# Altium PCB Projet_PCB.PcbDoc
Units mil, origin at the board's own origin, x right, y up, seen from the top; angles counter-clockwise.
Board outline 4780 x 3335 mil, 2 copper layers (Top Layer, Bottom Layer); 41 components, 25 nets, 320 pads, 22 vias.
Unrouted connection lines stored in the file: 20.
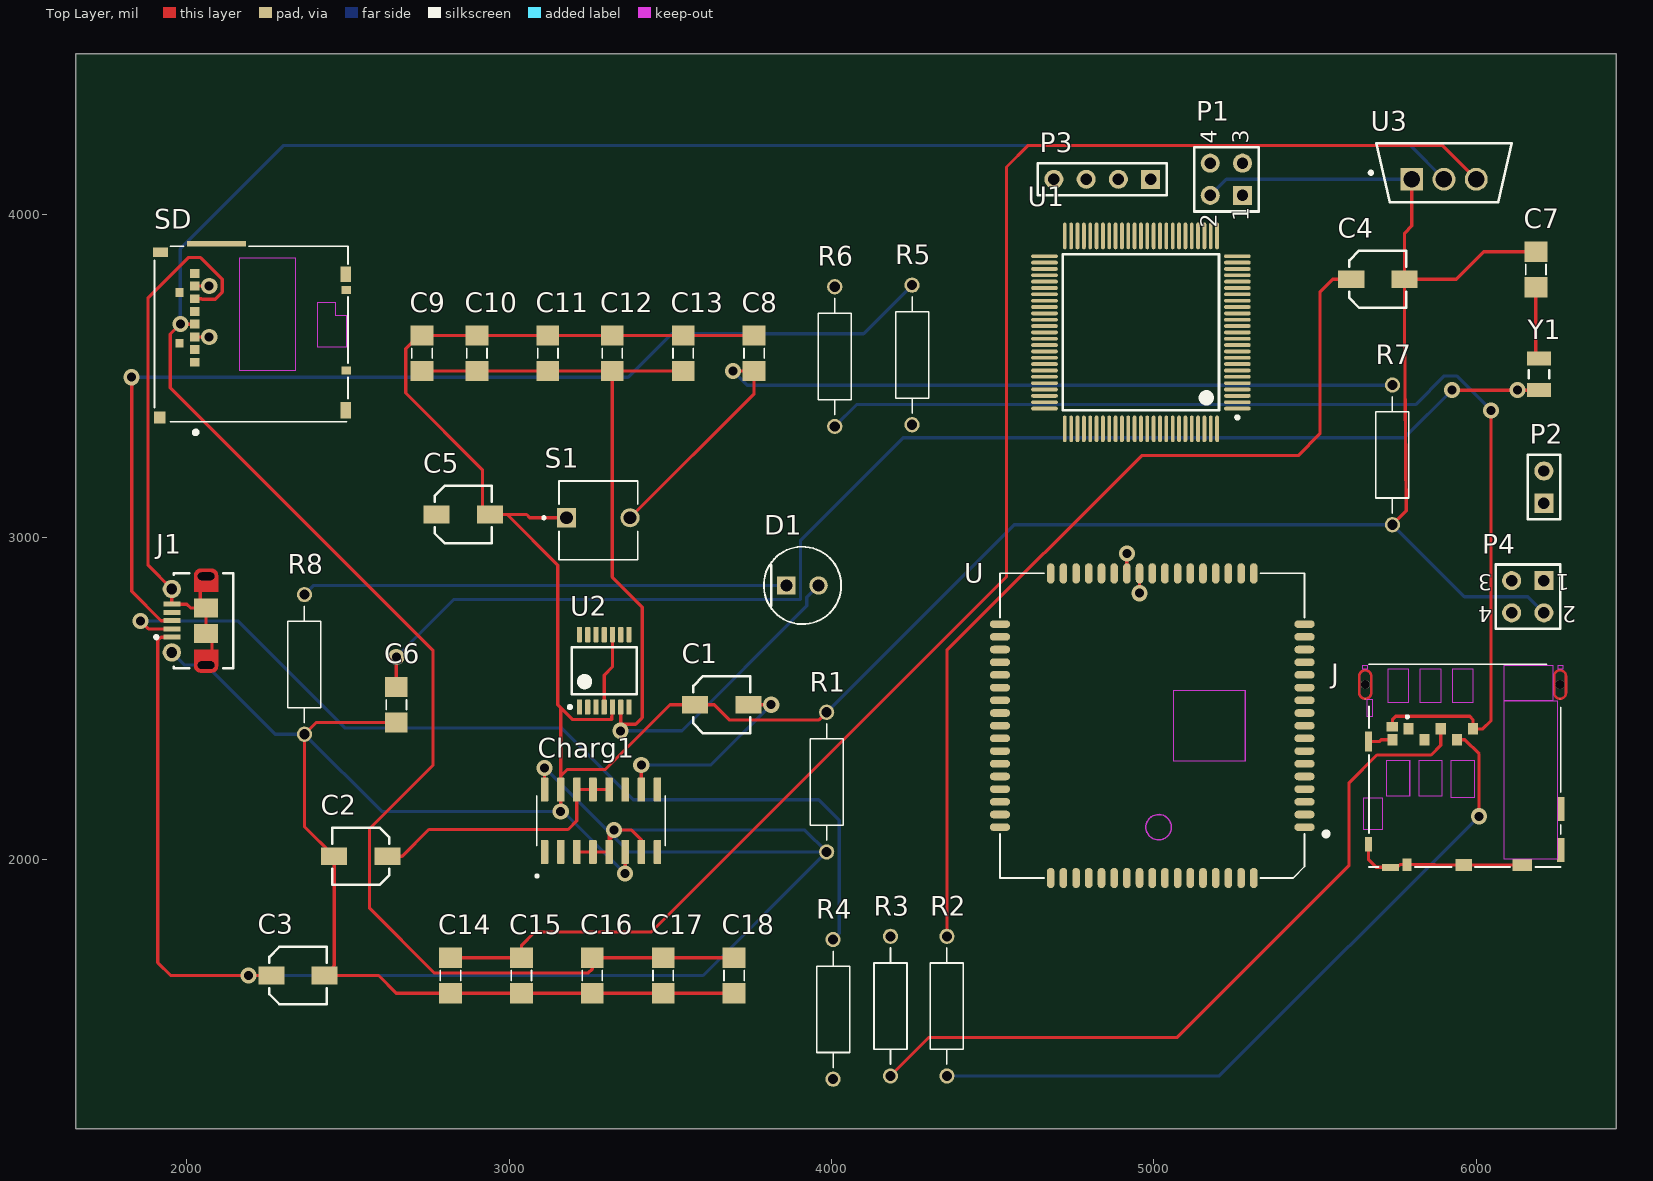
[diagram p0: Top Layer view]
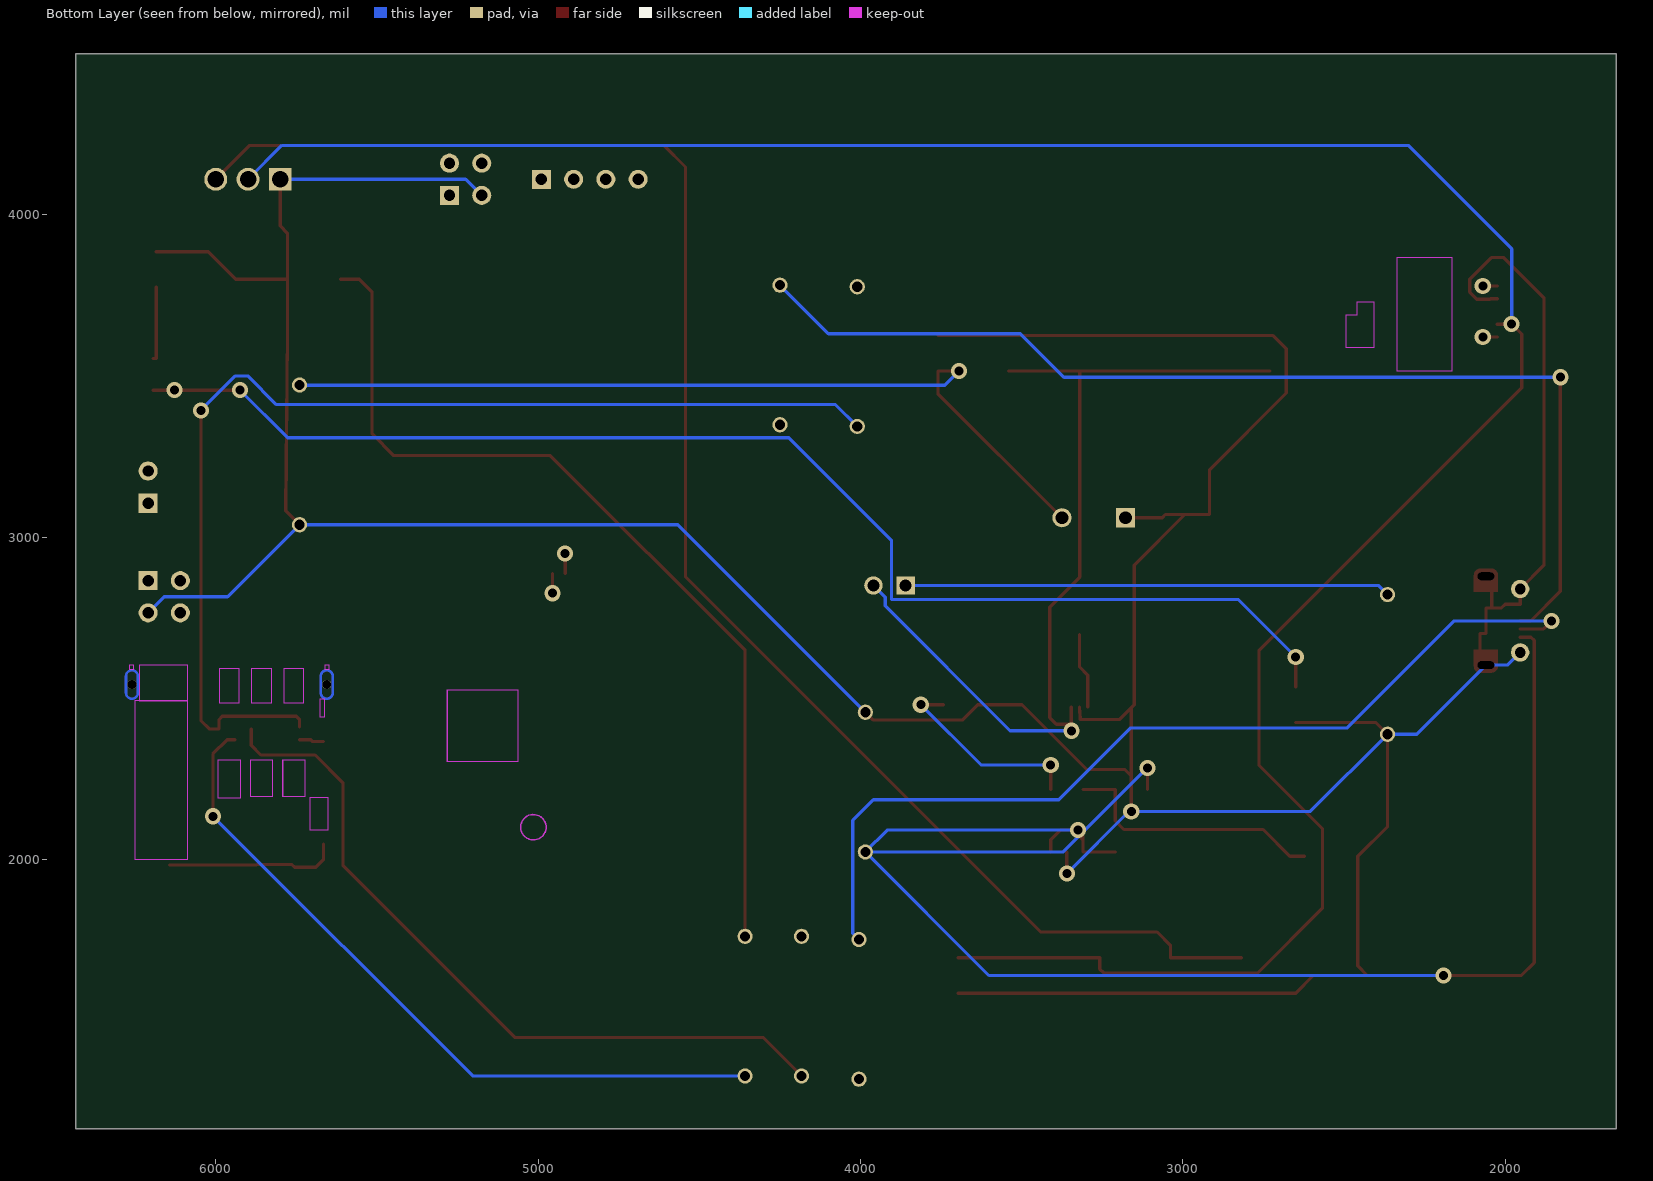
[diagram p1: Bottom Layer view, seen from below]
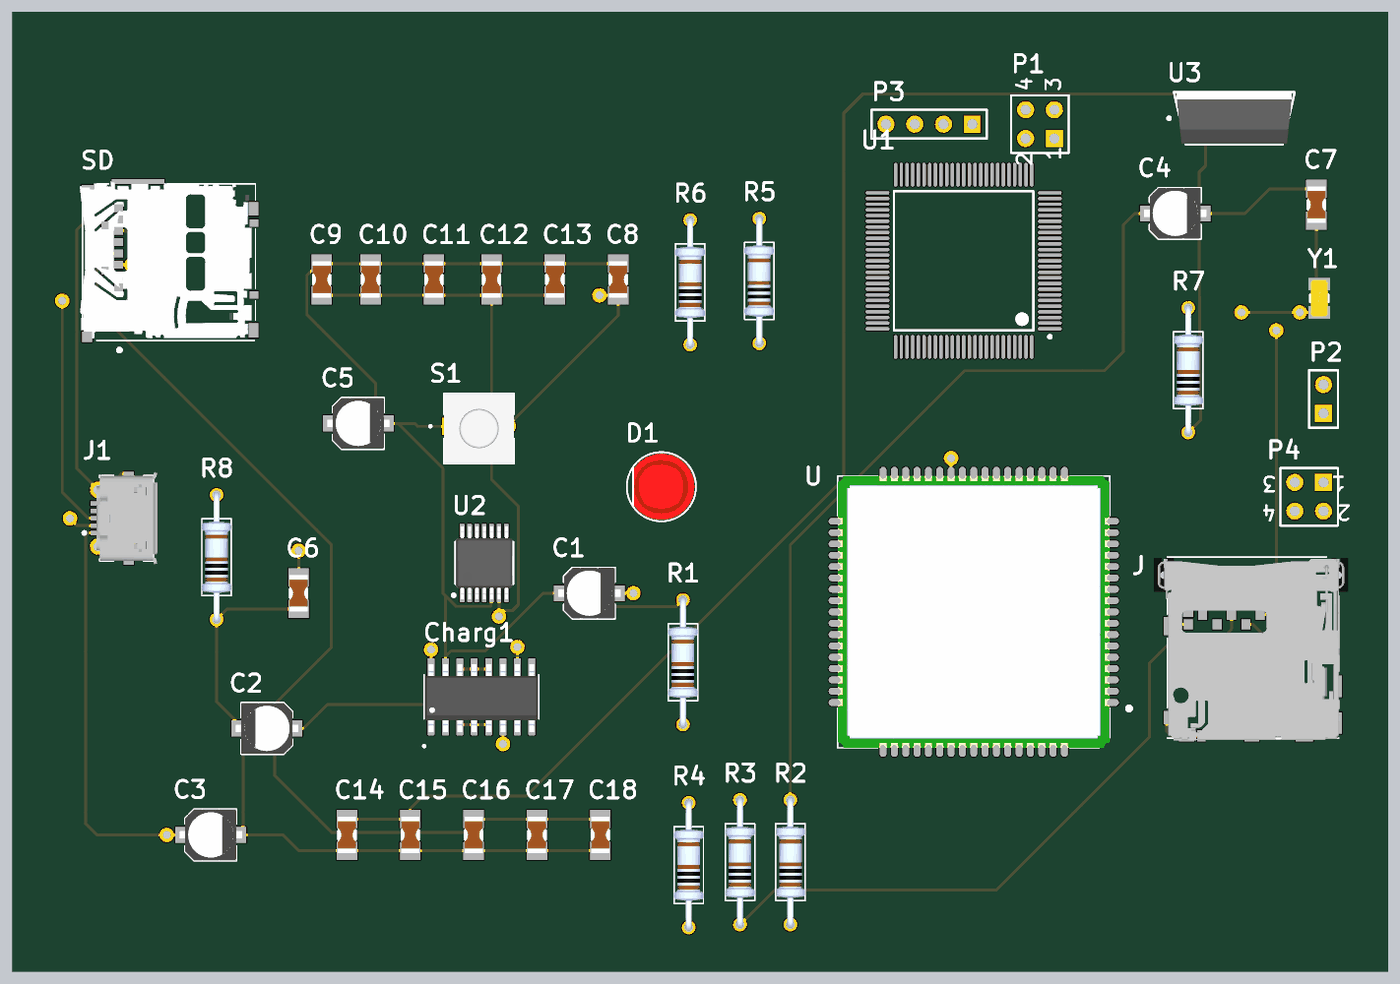
[diagram p2: 3D render of the assembled board from above, using the file's embedded part models]

## Layer stack, top to bottom
Top Solder: solder mask 0.4, Solder Resist, Dk 3.5
Top Layer: signal copper 1.4
Dielectric 1: dielectric 12.6, FR-4, Dk 4.8
Bottom Layer: signal copper 1.4
Bottom Solder: solder mask 0.4, Solder Resist, Dk 3.5

## Board outline
1655,1165 6435,1165 6435,4500 1655,4500

## Design rules (kind name [scope] priority, off if disabled: settings)
Clearance [All] p1: gap=10 ignorepadtopadclearanceinfootprint=FALSE except(0: Arc-Hole Track-Hole SMDPad-Hole THPad-Hole Via-Hole Fill-Hole Poly-Hole Region-Hole Text-Hole)
PolygonConnect [All] p1: connectstyle=Relief reliefconductorwidth=10 reliefentries=4 polygonreliefangle="90 Angle" airgapwidth=10
RoutingVias [All] p1: holewidth=28 width=50 viastyle="Through Hole" minholewidth=28 minwidth=50 maxholewidth=28 maxwidth=50
SolderMaskExpansion [All] p1: expansion=4 istentingtop=FALSE
Width [All] p1: maxlimit=10 minlimit=10 preferedwidth=10
30 further rules are at their usual default settings.

## Components (designator, comment, footprint, x,y, rotation, side; value= is the part's Value field where it differs from the comment)
C1 "EEE-1CA100SR" Capacitor 3660,2480 r0 top
C2 "EEE-1CA100SR" Capacitor 2540,2010 r180 top
C3 "EEE-1CA100SR" Capacitor 2345,1640 r0 top
C4 "EEE-1CA100SR" Capacitor 5695,3800 r0 top
C5 "EEE-1CA100SR" Capacitor 2857.68,3070 r0 top
C6 "capacitorrect" CAPCRect 2650,2480 r270 top
C7 "capacitorrect" CAPCRect 6185,3830.12 r90 top
C8 "capacitorrect" CAPCRect 3760,3570.12 r90 top
C9 "capacitorrect" CAPCRect 2730,3570.12 r90 top
C10 "capacitorrect" CAPCRect 2900,3570.12 r90 top
C11 "capacitorrect" CAPCRect 3120,3570.12 r90 top
C12 "capacitorrect" CAPCRect 3320,3570.12 r90 top
C13 "capacitorrect" CAPCRect 3540,3570.12 r90 top
C14 "capacitorrect" CAPCRect 2817.95,1640 r90 top
C15 "capacitorrect" CAPCRect 3037.95,1640 r90 top
C16 "capacitorrect" CAPCRect 3257.95,1640 r90 top
C17 "capacitorrect" CAPCRect 3477.95,1640 r90 top
C18 "capacitorrect" CAPCRect 3697.95,1640 r90 top
Charg1 "chargeur li" chargeurli 3285,2120 r90 top
D1 "HLMP-4700" Led 3910,2850 r0 top
J "Simcard" Simconnector 5865,2353.82 r180 top
J1 "105017-0001" USB-MICRO-B_V 2006.85,2740.63 r90 top
P1 "Header 2X2" HDR2X2 5275,4060 r90 top
P2 "Header 2" HDR1X2 6210,3105 r90 top
P3 "Header 4" HDR1X4 4990,4110 r180 top
P4 "Header 2X2" HDR2X2 6210,2865 r180 top
R1 "RESISTORTH" RESTH 3985,2240 r90 top
R2 "RESISTORTH" RESTH 4357.95,1545 r90 top
R3 "RESISTORTH" RESTH 4182.95,1545 r90 top
R4 "RESISTORTH" RESTH 4005,1535 r90 top
R5 "RESISTORTH" RESTH 4250,3565 r90 top
R6 "RESISTORTH" RESTH 4010,3560 r90 top
R7 "RESISTORTH" RESTH 5740,3255 r90 top
R8 "RESISTORTH" RESTH 2365,2605 r90 top
S1 "switcher" switcher 3276.57,3060 r0 top
SD "SDcard" SD 2200,3630 r270 top
U "SIM900" sim900 4995,2415 r180 top
U1 "STM32F407VGT6J" Stm32 4960,3635 r180 top
U2 "TPA6138A2PWR" audio 3295,2585 r90 top
U3 "LM317KCT" LM317 5900,4130.37 r90 top
Y1 "ABS07-166-32.768KHZ-T" XTAL 6195,3505 r270 top

## Footprints (in the part's own frame and the unit in brackets; to place one, negate y for a bottom-side part, rotate by r counter-clockwise, add the part's x,y. Pads: shape width x height; smd on the part's side, far side on the other; paste and mask are expansions set on the pad)
audio [mm] "SOP, 14-Leads, Body 5.1x4.5mm, Pitch 0.65mm, IPC High Density"
  rrect25% 1.2x0.4 smd: 1(-2.85,1.95) 2(-2.85,1.3) 3(-2.85,0.65) 4(-2.85,0) 5(-2.85,-0.65) 6(-2.85,-1.3) 7(-2.85,-1.95) 8(2.85,-1.95) 9(2.85,-1.3) 10(2.85,-0.65) 11(2.85,0) 12(2.85,0.65) 13(2.85,1.3) 14(2.85,1.95)
  silkscreen extent -2.97,-2.55 1.85,2.82, body extent -3.21,-2.5 3.21,2.5, height 1
Capacitor [mm] "Aluminum Electrolytic Capacitor, 2-Leads, Body 4.5x4.5mm, IPC High Density"
  rect 2.05x1.4 smd: 1(-2.1,0) 2(2.1,0)
  silkscreen extent -2.25,-2.25 2.25,2.25, body extent -2.75,-2.25 2.75,2.25, height 5.5
CAPCRect [mm]
  rect 1.6x1.8 smd: 1(-1.4,0) 2(1.4,0)
  silkscreen extent -0.4,-0.8 0.4,0.8, body extent -1.6,-0.8 1.6,0.8, height 1.5
chargeurli [mm]
  rrect25% 1.9x0.6 smd: 1(-2.455,4.445) 2(-2.455,3.175) 3(-2.455,1.905) 4(-2.455,0.635) 5(-2.455,-0.635) 6(-2.455,-1.905) 7(-2.455,-3.175) 8(-2.455,-4.445) 9(2.455,-4.445) 10(2.455,-3.175) 11(2.455,-1.905) 12(2.455,-0.635) 13(2.455,0.635) 14(2.455,1.905) 15(2.455,3.175) 16(2.455,4.445)
  silkscreen extent -4.45,-5.07 1.95,5.14, body extent -3.13,-4.95 2.87,4.95, height 1.75
HDR1X2 [mm] "Connector; Header; 2 Position"
  rect 1.5x1.5 hole 0.9: 1(0,0)
  round 1.5 hole 0.9: 2(2.54,0)
  silkscreen extent -1.27,-1.27 3.81,1.27
HDR1X4 [mm] "Connector; Header; 4 Position"
  rect 1.5x1.5 hole 0.9: 1(0,0)
  round 1.5 hole 0.9: 2(2.54,0) 3(5.08,0) 4(7.62,0)
  silkscreen extent -1.27,-1.27 8.89,1.27
HDR2X2 [mm] "Connector; Header; 2x2 Position"
  rect 1.5x1.5 hole 0.9: 1(0,0)
  round 1.5 hole 0.9: 2(0,2.54) 3(2.54,0) 4(2.54,2.54)
  silkscreen extent -1.27,-1.27 3.81,3.81
Led [mm]
  rect 1.45x1.45 hole 0.95 paste-1000 mask+0: 1(-1.27,0)
  round 1.45 hole 0.95 paste-1000 mask+0: 2(1.27,0)
  silkscreen extent -3.05,-3.05 3.05,3.05, body extent -3.15,-3.15 3.15,3.15, height 0.25
LM317 [mm]
  rect 1.8x1.8 hole 1.3 paste-1000 mask+0: 1(-0.517,2.54)
  round 1.8 hole 1.3 paste-1000 mask+0: 2(-0.517,0) 3(-0.517,-2.54)
  silkscreen extent -2.33,-5.34 2.33,5.88, body extent -2.42,-5.44 2.42,5.44, height 0.25
RESTH [mm]
  round 1.2 hole 0.8: 1(-5.5,0) 2(5.5,0)
  silkscreen extent -4.58,-1.3 4.58,1.3, body extent -5.77,-1.3 5.77,1.3, height 2.6
SD [mm]
  rect 0.7x0.75 smd: 1(2.225,-4.45) 2(1.225,-4.45) 3(0.225,-4.45) 4(-0.775,-4.45) 5(-1.775,-4.45) 6(-2.775,-4.45) 7(-3.775,-4.45) 8(-4.775,-4.45)
  rect 0.7x0.65 smd: 9(0.725,-5.65) 10(-3.275,-5.65)
  rect 0.65x0.75 smd: 11(2.875,7.5) 12(-3.475,7.5)
  rect 0.745x1.15 smd: SH1(-6.46,-7.15)
  rect 0.95x0.9 smd: SH2(6.575,-7.225)
  rect 0.42x4.63 smd: SH3(-7.123,-2.74)
  rect 1.2x0.85 smd: SH4(-4.713,7.45)
  rect 1.3x0.85 smd: SH5(6.012,7.45)
  Keep-Out Layer region: 1.038,5.225 -2.512,5.225 -2.512,6.625 -1.468,6.625 -1.468,7.475 1.038,7.475
  Keep-Out Layer region: 2.887,-0.925 -6.013,-0.925 -6.013,3.475 2.887,3.475
  silkscreen extent -6.91,-7.62 7.9,7.62, body extent -7.21,-7.86 6.79,7.41
sim900 [mm]
  oval 1.6x0.6 smd: 1(-12,8) 2(-12,7) 3(-12,6) 4(-12,5) 5(-12,4) 6(-12,3) 7(-12,2) 8(-12,1) 9(-12,0) 10(-12,-1) 11(-12,-2) 12(-12,-3) 13(-12,-4) 14(-12,-5) 15(-12,-6) 16(-12,-7) 17(-12,-8) 35(12,-8) 36(12,-7) 37(12,-6) 38(12,-5) 39(12,-4) 40(12,-3) 41(12,-2) 42(12,-1) 43(12,0) 44(12,1) 45(12,2) 46(12,3) 47(12,4) 48(12,5) 49(12,6) 50(12,7) 51(12,8)
  oval 0.6x1.6 smd: 18(-8,-12) 19(-7,-12) 20(-6,-12) 21(-5,-12) 22(-4,-12) 23(-3,-12) 24(-2,-12) 25(-1,-12) 26(0,-12) 27(1,-12) 28(2,-12) 29(3,-12) 30(4,-12) 31(5,-12) 32(6,-12) 33(7,-12) 34(8,-12) 52(8,12) 53(7,12) 54(6,12) 55(5,12) 56(4,12) 57(3,12) 58(2,12) 59(1,12) 60(0,12) 61(-1,12) 62(-2,12) 63(-3,12) 64(-4,12) 65(-5,12) 66(-6,12) 67(-7,12) 68(-8,12)
  Keep-Out Layer circle w0.127: c-0.5,8 r1
  Keep-Out Layer circle w0.127: c-0.5,8 r1
  Keep-Out Layer circle w0.127: c-0.5,8 r1
  Keep-Out Layer region: -1.7,-2.804 -7.31,-2.804 -7.31,2.8 -1.7,2.8
  Keep-Out Layer region: -1.7,-2.803 -7.308,-2.803 -7.308,2.8 -1.7,2.8
  silkscreen extent -13.75,-12 12,12, body extent -12,-12 12,12, height 2.8
Simconnector [mm]
  rect 0.8x0.9 smd: C1(1.905,-1.3) C2(-0.635,-1.3) C3(-3.175,-1.3) C5(3.175,-0.45) C6(0.635,-0.45) C7(-1.905,-0.45)
  rect 0.1x0.1 smd paste-1 mask+0: C8(5.315,-3.657) C17(-10.035,-3.657)
  rect 0.54x1.6 smd: C9(5.065,-0.3)
  rect 0.54x1.17 smd: C10(5.065,7.785)
  rect 1.33x0.55 smd: C11(3.33,9.605)
  rect 0.7x0.98 smd: C12(2.015,9.39)
  rect 1.3x0.91 smd: C13(-2.435,9.425)
  rect 1.53x0.91 smd: C14(-7.07,9.425)
  rect 0.6x1.9 smd: C15(-10.085,8.25)
  rect 0.5x1.9 smd: C16(-10.135,5.02)
  rect 0.9x0.75 smd: SW(3.175,-1.475)
  round 0.7 hole 0.7 unplated: ""(-10.035,-4.8) ""(5.315,-4.8)
  Top Layer region: 124 vertices and 1 holes, not listed, extent -10.585,-6 -9.485,-3.6
  Top Layer region: 126 vertices and 1 holes, not listed, extent 4.765,-6 5.865,-3.6
  Bottom Layer region: 124 vertices and 1 holes, not listed, extent -10.585,-6 -9.485,-3.6
  Bottom Layer region: 126 vertices and 1 holes, not listed, extent 4.765,-6 5.865,-3.6
  Keep-Out Layer region: -5.624,-3.502 -9.806,-3.502 -9.806,8.97 -5.624,8.97
  Keep-Out Layer region: -5.624,-6.326 -9.458,-6.326 -9.458,-3.5 -5.624,-3.5
  Keep-Out Layer region: -1.565,-6.021 -3.155,-6.021 -3.155,-3.35 -1.565,-3.35
  Keep-Out Layer region: 0.975,-6.024 -0.615,-6.024 -0.615,-3.35 0.975,-3.35
  Keep-Out Layer region: 3.515,-6.031 1.928,-6.031 1.928,-3.35 3.515,-3.35
  Keep-Out Layer region: 5.515,-6.332 5.175,-6.332 5.175,-6.02 5.515,-6.02
  Keep-Out Layer region: 5.165,-3.65 4.765,-3.65 4.765,-2.25 5.165,-2.25
  Keep-Out Layer region: -1.465,1.172 -3.261,1.172 -3.261,4.12 -1.465,4.12
  Keep-Out Layer region: 1.075,1.171 -0.716,1.171 -0.716,4 1.075,4
  Keep-Out Layer region: 3.615,1.172 1.828,1.172 1.828,4 3.615,4
  Keep-Out Layer region: 5.42,4.127 3.977,4.127 3.977,6.63 5.42,6.63
  Keep-Out Layer region: -9.9,-6.323 -10.24,-6.323 -10.24,-6.02 -9.9,-6.02
  Keep-Out Layer region: -5.624,-3.505 -9.815,-3.505 -9.815,8.97 -5.624,8.97
  Keep-Out Layer region: -5.624,-6.322 -9.452,-6.322 -9.452,-3.5 -5.624,-3.5
  Keep-Out Layer region: -1.565,-6.027 -3.159,-6.027 -3.159,-3.35 -1.565,-3.35
  Keep-Out Layer region: 0.975,-6.023 -0.615,-6.023 -0.615,-3.35 0.975,-3.35
  Keep-Out Layer region: 3.515,-6.021 1.925,-6.021 1.925,-3.35 3.515,-3.35
  Keep-Out Layer region: 5.515,-6.326 5.17,-6.326 5.17,-6.02 5.515,-6.02
  Keep-Out Layer region: 5.165,-3.653 4.768,-3.653 4.768,-2.25 5.165,-2.25
  Keep-Out Layer region: -1.465,1.172 -3.261,1.172 -3.261,4.12 -1.465,4.12
  Keep-Out Layer region: 1.075,1.171 -0.716,1.171 -0.716,4 1.075,4
  Keep-Out Layer region: 3.615,1.171 1.826,1.171 1.826,4 3.615,4
  Keep-Out Layer region: 5.42,4.123 3.973,4.123 3.973,6.63 5.42,6.63
  Keep-Out Layer region: -9.9,-6.332 -10.255,-6.332 -10.255,-6.02 -9.9,-6.02
  Keep-Out Layer region: -5.624,-3.506 -9.818,-3.506 -9.818,8.97 -5.624,8.97
  Keep-Out Layer region: -5.624,-6.322 -9.454,-6.322 -9.454,-3.5 -5.624,-3.5
  Keep-Out Layer region: -1.565,-6.024 -3.157,-6.024 -3.157,-3.35 -1.565,-3.35
  Keep-Out Layer region: 0.975,-6.03 -0.616,-6.03 -0.616,-3.35 0.975,-3.35
  Keep-Out Layer region: 3.515,-6.028 1.927,-6.028 1.927,-3.35 3.515,-3.35
  Keep-Out Layer region: 5.515,-6.332 5.175,-6.332 5.175,-6.02 5.515,-6.02
  Keep-Out Layer region: 5.165,-3.653 4.769,-3.653 4.769,-2.25 5.165,-2.25
  Keep-Out Layer region: -1.465,1.172 -3.261,1.172 -3.261,4.12 -1.465,4.12
  Keep-Out Layer region: 1.075,1.171 -0.715,1.171 -0.715,4 1.075,4
  Keep-Out Layer region: 3.615,1.17 1.825,1.17 1.825,4 3.615,4
  Keep-Out Layer region: 5.42,4.121 3.971,4.121 3.971,6.63 5.42,6.63
  Keep-Out Layer region: -9.9,-6.332 -10.255,-6.332 -10.255,-6.02 -9.9,-6.02
  silkscreen extent -10.09,-6.4 5.01,9.58, body extent -10.16,-6.22 5.33,9.78, height 0.65
Stm32 [mm] "Thin QFP, 100-Leads, Body 14x14mm, Pitch 0.5mm, IPC Low Density"
  oval 2.1x0.3 smd: 1(-7.6,6) 2(-7.6,5.5) 3(-7.6,5) 4(-7.6,4.5) 5(-7.6,4) 6(-7.6,3.5) 7(-7.6,3) 8(-7.6,2.5) 9(-7.6,2) 10(-7.6,1.5) 11(-7.6,1) 12(-7.6,0.5) 13(-7.6,0) 14(-7.6,-0.5) 15(-7.6,-1) 16(-7.6,-1.5) 17(-7.6,-2) 18(-7.6,-2.5) 19(-7.6,-3) 20(-7.6,-3.5) 21(-7.6,-4) 22(-7.6,-4.5) 23(-7.6,-5) 24(-7.6,-5.5) 25(-7.6,-6) 51(7.6,-6) 52(7.6,-5.5) 53(7.6,-5) 54(7.6,-4.5) 55(7.6,-4) 56(7.6,-3.5) 57(7.6,-3) 58(7.6,-2.5) 59(7.6,-2) 60(7.6,-1.5) 61(7.6,-1) 62(7.6,-0.5) 63(7.6,0) 64(7.6,0.5) 65(7.6,1) 66(7.6,1.5) 67(7.6,2) 68(7.6,2.5) 69(7.6,3) 70(7.6,3.5) 71(7.6,4) 72(7.6,4.5) 73(7.6,5) 74(7.6,5.5) 75(7.6,6)
  oval 0.3x2.1 smd: 26(-6,-7.6) 27(-5.5,-7.6) 28(-5,-7.6) 29(-4.5,-7.6) 30(-4,-7.6) 31(-3.5,-7.6) 32(-3,-7.6) 33(-2.5,-7.6) 34(-2,-7.6) 35(-1.5,-7.6) 36(-1,-7.6) 37(-0.5,-7.6) 38(0,-7.6) 39(0.5,-7.6) 40(1,-7.6) 41(1.5,-7.6) 42(2,-7.6) 43(2.5,-7.6) 44(3,-7.6) 45(3.5,-7.6) 46(4,-7.6) 47(4.5,-7.6) 48(5,-7.6) 49(5.5,-7.6) 50(6,-7.6) 76(6,7.6) 77(5.5,7.6) 78(5,7.6) 79(4.5,7.6) 80(4,7.6) 81(3.5,7.6) 82(3,7.6) 83(2.5,7.6) 84(2,7.6) 85(1.5,7.6) 86(1,7.6) 87(0.5,7.6) 88(0,7.6) 89(-0.5,7.6) 90(-1,7.6) 91(-1.5,7.6) 92(-2,7.6) 93(-2.5,7.6) 94(-3,7.6) 95(-3.5,7.6) 96(-4,7.6) 97(-4.5,7.6) 98(-5,7.6) 99(-5.5,7.6) 100(-6,7.6)
  silkscreen extent -7.73,-6.15 6.15,6.82, body extent -7,-7 7,7, height 1.6
switcher [mm]
  rect 1.508x1.508 / inner round 1.508 / far side rect 1.508x1.508 hole 1: 1(-2.5,0)
  round 1.508 hole 1: 2(2.5,0)
  silkscreen extent -4.39,-3.3 3.1,2.9, body extent -3.1,-3.3 3.1,2.9, height 4.3
USB-MICRO-B_V [mm] "USB, MICRO B, Body 7.491x4.695 mm, Pitch 0.65 mm"
  rect 0.4x1.35 smd: 1(-1.3,1.35) 2(-0.65,1.35) 3(0,1.35) 4(0.65,1.35) 5(1.3,1.35)
  round 1.45 hole 0.85: 6(-2.5,1.35) 7(2.5,1.35)
  rrect50% 0x0 hole 0.6 slot 1.3 at 90 deg: 8(-3.5,-1.35) 11(3.5,-1.35)
  rect 1.5x1.9 smd: 9(-1,-1.35) 10(1,-1.35)
  Top Layer circle w0.5: c-3.6,-0.9 r0.25
  Top Layer circle w0.5: c3.6,-1.8 r0.25
  Top Layer circle w0.5: c-3.6,-1.8 r0.25
  Top Layer region: -2.3,-2.3 -2.3,-0.4 -3.6,-0.4 -3.6,-2.3
  Top Layer region: 2.3,-0.4 2.3,-2.3 3.6,-2.3 3.6,-0.4
  Top Layer region: 3.6,-0.9 3.6,-1.8 4.1,-1.8 4.1,-0.9
  Top Layer region: -3.6,-1.8 -3.6,-0.9 -4.1,-0.9 -4.1,-1.8
  Top Layer lines w0.5: 3.35,-0.893 ccw(c3.6,-0.9) 3.5,-1.129 ccw(c3.6,-0.9) 3.6,-1.15 ccw(c3.6,-0.9) 3.35,-0.893
  silkscreen extent -3.75,-3.5 3.75,2.7, body extent -4.1,-3.9 4.1,1.5, height 2.67
XTAL [mm]
  rect 1.1x1.9 smd paste+0 mask+0: 1(-1.25,0) 2(1.25,0)
  silkscreen extent -0.33,-0.8 0.33,0.8, body extent -1.9,-1.05 1.9,1.05, height 0.25

## Part data
C1 C2 C3 C4 C5: library part Capacitor, "Aluminum Electrolytic Capacitor, 10 uF, +/- 20%, -40 to 85 degC, 2-Pin SMD, RoHS, Tape and Reel", AC Ripple Current=28mA, AE Capacitor Case=RadialCan-SMD, Capacitance=10µF, Capacitance Tolerance=±20%, Capacitor Mounting=SMD, Leakage Current=3µA, Life Time @ Temperature=2000hours@85°C, Manufacturer=Panasonic, Operating Life Temperature=85°C, Operating life Time=2000h, Operating Temperature Min=-40°C, Operating Temperature Range=-40°Cto+85°C, Package / Case=B, Package Description="2-Pin Surface Mount Device, Body 4.5 x 4.5 mm", Package Reference=EEE1CA100SR, Power Factor=0.16, Power Factor Frequency=120Hz, Tolerance +=20%, Voltage Rating=16V, Capacitance Tolerance ±=±20%, Capacitor Case Style=RadialCan-SMD, Capacitor Terminals=SMD, Datasheet URL=https://datasheet.ciiva.com/19458/1355487-19458346.pdf, Datasheet Version=04/2005, Diameter=4mm, External Depth=4.3mm, External Length / Height=5.4mm, External Width=4.3mm, Height=5.4mm, Lead Cross-section Width=0.65mm, Lead Length=1.8mm, Lead Spacing=1mm, Lifetime @ Temperature=2000hours@85°C, Manufacturer URL=http://www.panasonic.com/, Mounting Technology=SurfaceMount, No. of Pins=2, Operating Lifetime=2000h, Operating Temperature Max=85°C, Packaging=CutTape, Product Range=PANASONIC-SSeries, Ripple Current AC=28mA, Ripple Current Frequency=120Hz, Ripple Current Temperature=85°C, Series=VS, SVHC=NoSVHC(16-Dec-2013), Tape Width=12mm, Tolerance -=20%, Voltage Rating V DC=16V
C6 C7 C8 C9 C10 C11 C12 C13 C14 C15 C16 C17 C18: "Tantalum Capacitors", Package="1206 AVX", Availability=Unavailable, MF=AVX, MP=TBJA475K020RBLC0024, Price=None, SnapEDA_Link=https://www.snapeda.com/parts/TBJA475K020RBLC0024/AVX/view-part/1734994/?ref=snap
Charg1: Package=None, Availability=Unavailable, MP=MCP73861-I/SL, Price=None
D1: library part led, "LED RED DIFFUSED T-1 3/4 T/H", Colour=Red, Forward Current=2mA, Forward Voltage=1.7V, Manufacturer=Broadcom, Power Dissipation=14mW, Reverse Voltage=5V, Temperature="-40°C to +100°C", Temperature Range High=+100°C, Temperature Range Low=-40°C, Automotive=No, Category=Diode, ComponentLink2Description=Datasheet, ComponentLink2URL=https://docs.broadcom.com/docs/AV02-1557EN, Device Class L1=Optoelectronics, Device Class L2=LEDs, Device Class L3=unset, Digikey Description="LED RED DIFFUSED T-1 3/4 T/H", Lead Free=Yes, Led Orientation=Straight, Luminous Intensity=2.3mcd, Manufacturer Part Number=HLMP-4700, Mouser Description="LED; Red; 2.3mcd; 0.24In.Dia.; T-1-3/4; 500mA; 1.7V; 635nm; 50deg; 5V; 24mW; -55degC;", Octopart=https://octopart.com/hlmp-4700-broadcom-71130526, Package=HLMP-4700, Peak Emmision Wavelength=635nm, RoHS=TRUE, Viewing Angle=50°, Wavelength=626nm
J: "CONNECTOR, SIM SOCKET, 6POS, 2.54MM; Connector Type:SIM Socket; Series:2174803;", Package=None, Voltage_Rating="10 VAC", Availability=Unavailable, Centerline_Pitch="2.54 mm[.1 in]", EU_RoHS_Compliance=Compliant, MF="TE Connectivity", MP=2174803-2, Number_of_Positions=6, Price=None, Product_Type=Connector, SnapEDA_Link=https://www.snapeda.com/parts/2174803-2/TE%20Connectivity%20AMP%20Connectors/view-part/47676/?ref=snap, TE_purchase_URL=https://www.te.com/usa-en/product-2174803-2.html?te_bu=Cor&te_type=disp&te_campaign=seda_glo_cor-seda-global-disp-prtnr-fy19-seda-model-bom-cta_sma-317_1&elqCampaignId=32493
J1: library part USB, "Micro-USB B Receptacle, Right Angle, Bottom Mount, Surface Mount, with Solder Tabs, -30 to 85 degC, 5-Pin USB, RoHS, Tape and Reel", Manufacturer=Molex, Package Description="5-Leads USB, Micro B, Body 7.5 x 5 mm, Pitch 0.65 mm", Package Reference=MICRO-B, Package Version="Rev. F, 12/2012", Standard Package=1, Voltage - Max=30V, 3D Model=105017-0001.stp, Catalog Drawings=1050170001, Category=Connectors,Interconnects, Circuits=5, Connector Type=USB-microB, Datasheet URL=http://www.molex.com/elqNow/elqRedir.htm?ref=http://www.molex.com/webdocs/datasheets/pdf/en-us/1050170001_IO_CONNECTORS.pdf, Datasheet Version=03/2016, Family=USB,DVI,HDMIConnectors, Featured Product=Micro-USBConnectorsUSBConnectors, Features=Shielded,SolderRetention, Gender=Receptacle, Ingress Protection=-, Manufacturer URL=http://www.molex.com/, Mating Products=WM17145-ND-CABLEMICROUSBBTOSTDA1.0MWM17147-ND-CABLEMICROUSBBTOSTDA2.0MWM17146-ND-CABLEMICROUSBBTOSTDA1.5M, Mounting Technology=SurfaceMount, Mounting Type=BoardCutout,SurfaceMount,RightAngle, Number of Contacts=5, Online Catalog=Molex-MicroUSB, Other Names=WM1399DKR, Package URL=http://www.molex.com/pdm_docs/sd/1050170001_sd.pdf, Packaging=Digi-Reel®, PCN Assembly/Origin=ResinSupplier21/Oct/2015, RoHS Information=1050170001CertofCompliance, Series=-, Specifications=-
P1 P4: "Header, 2-Pin, Dual row", LatestRevisionDate=17-Jul-2002, LatestRevisionNote="Re-released for DXP Platform.", Publisher="Altium Limited"
P2: "Header, 2-Pin", LatestRevisionDate=17-Jul-2002, LatestRevisionNote="Re-released for DXP Platform.", Publisher="Altium Limited"
P3: "Header, 4-Pin", LatestRevisionDate=17-Jul-2002, LatestRevisionNote="Re-released for DXP Platform.", Publisher="Altium Limited"
R1 R2 R3 R4 R5 R6 R7 R8: "10.2 kOhms Â±1% 0.25W, 1/4W Through Hole Resistor Axial - Metal Film", Package="Axial Yageo", Availability="In Stock", Check_prices=https://www.snapeda.com/parts/MFR-25FBF52-10K/Yageo/view-part/?ref=eda, MF=Yageo, MP=MFR-25FBF52-10K, Price=None, Purchase-URL=https://pricing.snapeda.com/search/part/MFR-25FBF52-10K/?ref=eda, SnapEDA_Link=https://www.snapeda.com/parts/MFR-25FBF52-10K/Yageo/view-part/?ref=snap
S1: "SWITCH TACTILE SPST-NO 0.05A 12V", Package=None, Availability="In Stock", Check_prices=https://www.snapeda.com/parts/TL59NF160Q/E-Switch/view-part/?ref=eda, MF=E-Switch, MP=TL59NF160Q, Price=None, Purchase-URL=https://pricing.snapeda.com/search/part/TL59NF160Q/?ref=eda, SnapEDA_Link=https://www.snapeda.com/parts/TL59NF160Q/E-Switch/view-part/?ref=snap
SD: "microSD Memory Card Push-push Type SCHA Series", Package=None, Availability=Unavailable, MF=ALPS, MP=SCHA4B0419, Price=None, SnapEDA_Link=https://www.snapeda.com/parts/SCHA4B0419/ALPS/view-part/455281/?ref=snap
U: "LPC11U00 GPRS/GSM For Use With LPC11U37, SIM900, mbed-Enabled Development", Package="DIP-60 Simcom", Availability=Unavailable, MF="Seeed Technology", MP=SIM900, Price=None, SnapEDA_Link=https://www.snapeda.com/parts/SIM900/Seeed%20Technology%20Co.%2C%20Ltd/view-part/105877/?ref=snap
U1: library part Stm, "ARM Cortex-M4 32-bit MCU+FPU, 210 DMIPS, 1024 kB Flash, 192 kB Internal RAM, 82 I/Os, 100-pin LQFP, -40 to 85 degC, Tray", I/Os (High Current)=82, Manufacturer=STMicroelectronics, Operating Frequency(F) (Processor speed) (MHz)=168, Supply Voltage(Vcc) max (V)=3.6, Supply Voltage(Vcc) min (V)=1.8, ComponentLink1Description="Manufacturer URL", ComponentLink1URL=http://www.st.com/web/en/home.html, ComponentLink2Description=Datasheet, ComponentLink2URL=http://www.st.com/st-web-ui/static/active/en/resource/technical/document/datasheet/DM00037051.pdf, ComponentLink3Description="Package Specification", ComponentLink3URL=http://www.st.com/st-web-ui/static/active/en/resource/technical/document/data_brief/DM00071938.pdf, Core="ARM Cortex-M4", D/A Converter=2x12-bit, DatasheetVersion="Rev. 4", FLASH Size (Prog) (kB)=1024, Internal RAM Size (kB)=192, Mounting Technology="Surface Mount", PackageDescription="100-Pin Low Profile Quad Flat Package, 14 x 14 mm Body, 0.5 mm Pitch", PackageReference=LQFP100, PackageVersion="Rev. 1, 06/2013", Packing=Tray, PartNumber=STM32F407VGT6J
U2: library part AUDIO, "DirectPath(TM) Headphone Driver with Adjustable Gain, -40 to 85 degC, 14-pin SOP (PW14), Green (RoHS & no Sb/Br)", Half Power THD + N @ 1 kHz (%)(kHz)=0.01, Manufacturer="Texas Instruments", Output Power(W)=0.04, Supply Max(Max)(Volt)=3.6, Supply Min(Min)(Volt)=3, Code_JEDEC=MO-153, ComponentLink1Description="Manufacturer URL", ComponentLink1URL=http://www.ti.com/, ComponentLink2Description=Datasheet, ComponentLink2URL=http://www.ti.com/general/docs/lit/getliterature.tsp?genericPartNumber=TPA6138A2&fileType=pdf, ComponentLink3Description="Package Specification", ComponentLink3URL=http://www.ti.com/litv/pdf/mpds360, DatasheetVersion=SLOS704A, Eco-Plan="Green (RoHS & no Sb/Br)", Ground-Centered Outputs=Yes, Headphone Channels=Stereo, Load(Min)(ohms)=16, Mounting Technology="Surface Mount", PackageDescription="14-Pin Plastic Small Outline, Body 5 x 4.4 mm, Pitch 0.65 mm", PackageReference=PW0014A, PackageVersion="4040064-3/G, 02/2011", PartNumber=TPA6138A2PWR, PSRR(dB)=80, Special Features="Adjustable Gain", SubFamily="Headphone Amplifier"
U3: library part Regulateur, "IC REG LIN POS ADJ 1.5A TO220-3", Case/Package=TO-220, Dropout Voltage=2V, Max Input Voltage=40V, Max Operating Temperature=125°C, Max Output Current=1.5A, Max Output Voltage=37V, Min Input Voltage=4.2V, Min Operating Temperature=0°C, Min Output Voltage=1.25V, Package Quantity=50, Power Rating=20W, Power Supply Rejection Ratio (PSRR)=57dB, Quiescent Current=3.5mA, Height=16.51mm, Lead Free="Lead Free", Length=10.67mm, Mount="Through Hole", Number of Outputs=1, Number of Pins=3, Number of Regulators=1, Output Current=1.5A, Output Type=Adjustable, Output Voltage=37V, Packaging=Rail/Tube, Polarity=Positive, Radiation Hardening=No, REACH SVHC="No SVHC", Reference Voltage=1.25V, RoHS Compliant=Yes, Series=LM317, Weight=0.211644oz, Width=4.65mm
Y1: library part XTAL, "CRYSTAL 32.7680KHZ 7PF SMD", Case/Package=SMD/SMT, ESR (Equivalent Series Resistance)=70kR, Frequency=32.768kHz, Frequency Tolerance=10ppm, Load Capacitance=7pF, Max Operating Temperature=85°C, Min Operating Temperature=-40°C, Mount="Surface Mount", Packaging="Tape and Reel", RoHS Compliant=Yes

## Via types
v1: diameter 50, hole 28, Top Layer to Bottom Layer, 22 vias

## Nets (pads, with @x,y where several pads share a name; then routed paths per layer and width w, separated by ;. In a path a pad name is that pad's centre, name@x,y a point inside that pad or via, vN(x,y) a via of type N, cw(c..) or ccw(c..) an arc to the next point about the centre after c; other vN are vias at no path point)
3.3v: C16.2 C17.2 C18.2 SD.4 U3.2 | length 7873.4
  Top Layer w10: v1(1980,3661) 1949,3630 1949,3463 2764,2648 2764,2293 2567,2096 2567,1848 2767,1648 3245.95,1648 3257.95,1660 C16.2 C17.2 C18.2 ; v1@1980.49,3660.51 SD.4
  Bottom Layer w10: v1@1980.49,3660.51 v1(1980,3661) 1980,3894 2301,4215 5795,4215 U3.2
GND: C1.1 C2.2 C3.2 C4.2 C5.2 C6.2 C7.2 C8.2 C9.2 C10.2 C11.2 C12.2 C13.2 C14.1 C15.1 C16.1 C17.1 C18.1 Charg1.6 Charg1.15 J1.5 J1.6 J1.7 J1.8 J1.9 J1.10 J1.11 J.C5 J.C8 J.C9 J.C10 J.C11 J.C12 J.C13 J.C14 J.C15 J.C16 J.C17 P1.2 P4.2 R1.2 R7.1 R8.1 S1.1 SD.6 U2.5 U3.1 | length 15533.2
  Top Layer w10: SD.6 2045.75,3739.25 2047,3738 2088,3738 2110,3760 2110,3800 2043,3867 2004,3867 1880,3743 1880,2912.76 J1.7 J1.5 2000,2791.81 2011.81,2780 J1.10@2042,2780 ; J1.8@2052.13,2598.9 2052.13,2602.83 J1.8 2060.83,2602.83 2078,2620 2078,2701.26 J1.9 J1.10 J1.10@2042,2780 ; J1.11@2052.13,2882.36 J1.11 2051.3,2878.43 2042,2878.43 2042,2872.52 J1.10@2042,2780 ; C6.2 2401.42,2424.88 R8.1 2365,2102.32 C2.2 2457.32,1669.64 C3.2 2595,1640 2650.12,1584.88 C14.1 C15.1 C16.1 C17.1 C18.1 ; v1(3160,2149) Charg1.15 3160,2259 ; S1.1 3064,3060 3054,3070 2994,3070 ; U2.5 3318,2434 3197,2434 3160,2471 ; v1(3360,1956) Charg1.6 ; C8.2 C13.2 C12.2 C11.2 C10.2 2815,3625.24 C9.2 2720,3625.24 2679,3584.24 2679,3447 2917,3209 2917,3070 C5.2 2994,3070 ; R1.2 3961.46,2433 3683,2433 3636,2480 C1.1 3499,2480 3298,2279 3180,2279 3160,2259 ; J.C10 5665.59,2000 5689.92,1975.67 J.C11 5755,1975.67 5763.46,1984.13 J.C12 5872,1984.13 5873.38,1982.76 J.C13 J.C14 ; J.C9 5699,2365.63 5704.91,2371.54 J.C5 ; R7.1 5783,3081.46 5777.68,3638.32 C4.2 ; U3.1 5800,3965.32 5777.68,3943 C4.2 ; C7.2 6023.24,3885.24 5938,3800 C4.2 ; 2994,3070 3151,2913 3151,2480 3160,2471 ; 3160,2259 3160,2471
  Bottom Layer w10: J1.6 1993.07,2602.83 J1.8 2274.37,2388.46 R8.1 2604.46,2149 v1(3160,2149) 3167,2149 v1(3360,1956) ; R1.2 4566.93,3038.46 R7.1 5963.46,2815 6160,2815 P4.2 ; P1.2 5225,4110 U3.1
NetC1_2: C1.2 Charg1.10 | length 627.1
  Top Layer w10: Charg1.10 v1(3410,2293) ; C1.2 v1(3813,2480)
  Bottom Layer w10: v1(3410,2293) 3626,2293 v1(3813,2480)
NetC2_1: C2.1 Charg1.12 Charg1.13 Charg1.14 | length 829.5
  Top Layer w10: C2.1 2668,2010 2751,2093 3183,2093 3210,2120 Charg1.14 Charg1.13 Charg1.12
NetC3_1: C3.1 Charg1.3 Charg1.4 Charg1.5 Charg1.7 Charg1.16 J1.1 R1.1 | length 5442.6
  Top Layer w10: J1.1 1920,2689.45 1910,2679.45 1910,1680 1950,1640 v1(2192,1640) C3.1 ; Charg1.16 v1(3110,2284) ; Charg1.3 Charg1.4 Charg1.5 3310,2061 ; v1(3325,2091) 3310,2076 3310,2061 ; Charg1.7 3410,2061 3380,2091 3340,2091 3310,2061
  Bottom Layer w10: v1(2192,1640) 3601.54,1640 R1.1 ; v1(3110,2284) 3370.54,2023.46 R1.1 ; v1(3325,2091) 3917.46,2091 R1.1
NetC4_1: C4.1 R2.2 | length 2876.3
  Top Layer w10: R2.2 4357.95,2648.95 4962,3253 5448,3253 5515,3320 5515,3760 5555,3800 C4.1
NetC6_1: C6.1 U1.12 Y1.2 | length 4087.7
  Top Layer w10: C6.1 v1(2650,2628) ; v1(5924.79,3455.79) v1(6127.6,3455.79) Y1.2
  Bottom Layer w10: v1(2650,2628) 2828.46,2806.46 3903.54,2806.46 3903.54,2989 4222.54,3308 5777,3308 v1(5924.79,3455.79)
NetC7_1: C7.1 U1.13 Y1.1 | length 230.8
  Top Layer w10: C7.1 6185,3554.21 Y1.1
NetC8_1: C8.1 R7.2 S1.2 U1.14 | length 2743.7
  Top Layer w10: S1.2 3760,3445 C8.1 v1(3695,3515) v1(3694.57,3515)
  Bottom Layer w10: v1(3695,3515) 3739,3471 5740,3471 R7.2
NetC14_2: C14.2 C15.2 U3.3 | length 5036
  Top Layer w10: C14.2 C15.2 3037.95,1732.86 3080,1774.9 3440.9,1774.9 4543,2877 4543,4148 4610,4215 5895,4215 U3.3
NetD1_1: D1.1 R8.2 | length 1506.8
  Bottom Layer w10: R8.2 2393.46,2850 D1.1
NetJ1_2: J1.2 R4.2 | length 2909.8
  Top Layer w10: v1(1856,2740) 1880.96,2715.04 J1.2
  Bottom Layer w10: v1(1856,2740) 2158,2740 2490,2408 3162,2408 3385,2185 3960,2185 4024,2121 4024,1770.54 R4.2
NetJ1_3: J1.3 R5.2 | length 3366
  Top Layer w10: v1(1829,3496) 1829,2831.63 1920,2740.63 J1.3
  Bottom Layer w10: v1(1829,3496) 3369,3496 3504,3631 4099.46,3631 R5.2
NetJ_C2: J.C2 R3.1 | length 2333.4
  Top Layer w10: R3.1 4302.49,1448 5073,1448 5605,1980 5605,2237 5692,2324 5860,2324 5890,2354 J.C2
NetJ_C3: J.C3 J.SW R6.1 | length 3483.3
  Top Layer w10: J.SW 5740,2434 5750,2444 5980,2444 5990,2434 J.C3 6020,2405 6046,2431 v1(6046,3393)
  Bottom Layer w10: R6.1 4077.54,3411 5812,3411 5901,3500 5939,3500 v1(6046,3393)
NetJ_C7: J.C7 R2.1 | length 2265.5
  Top Layer w10: J.C7 5965,2371.54 6009,2327.54 v1(6009,2134)
  Bottom Layer w10: R2.1 5203.46,1328.46 v1(6009,2134)
NetR4_1: R4.1 U1.70
NetR5_1: R5.1 U1.71
NetSD_2: SD.2 U1.91
NetSD_3: SD.3 U1.32 | length 44.8
  Top Layer w10: SD.3 v1(2069.57,3621.14)
NetSD_7: SD.7 U1.63 | length 44.8
  Top Layer w10: SD.7 v1(2069.57,3778.62)
NetU1_86: U1.86 U.28 | length 61.5
  Top Layer w10: U.28 v1(4916.26,2948.94)
NetU1_87: U1.87 U.27 | length 61.5
  Top Layer w10: v1(4955.63,2825.94) U.27
NetU2_4: U2.4 U2.10 | length 235
  Top Layer w10: U2.4 3295,2572 3320.59,2597.59 U2.10
VCC: C9.1 C10.1 C11.1 C12.1 C13.1 D1.2 U2.6 | length 2889.3
  Top Layer w10: C9.1 C10.1 C11.1 C12.1 ; v1(3346,2399.18) 3346.18,2399.36 v1@3346.18,2419.17 ; U2.6 v1@3346.18,2419.17 ; C13.1 C12.1 ; C12.1 3320,2876 3413,2783 3413,2440 3392.17,2419.17 v1@3346.18,2419.17
  Bottom Layer w10: v1(3346,2399.18) 3536.27,2399.18 3923.54,2786.46 3923.54,2813.54 D1.2
pads on no net: C5.1 Charg1.1 Charg1.2 Charg1.8 Charg1.9 Charg1.11 J1.4 J. J.C1 J.C6 P1.1 P1.3 P1.4 P2.1 P2.2 P3.1 P3.2 P3.3 P3.4 P4.1 P4.3 P4.4 R3.2 R6.2 SD.1 SD.5 SD.8 SD.9 SD.10 SD.11 SD.12 SD.SH1 SD.SH2 SD.SH3 SD.SH4 SD.SH5 U1.1 U1.2 U1.3 U1.4 U1.5 U1.6 U1.7 U1.8 U1.9 U1.10 U1.11 U1.15 U1.16 U1.17 U1.18 U1.19 U1.20 U1.21 U1.22 U1.23 U1.24 U1.25 U1.26 U1.27 U1.28 U1.29 U1.30 U1.31 U1.33 U1.34 U1.35 U1.36 U1.37 U1.38 U1.39 U1.40 U1.41 U1.42 U1.43 U1.44 U1.45 U1.46 U1.47 U1.48 U1.49 U1.50 U1.51 U1.52 U1.53 U1.54 U1.55 U1.56 U1.57 U1.58 U1.59 U1.60 U1.61 U1.62 U1.64 U1.65 U1.66 U1.67 U1.68 U1.69 U1.72 U1.73 U1.74 U1.75 U1.76 U1.77 U1.78 U1.79 U1.80 U1.81 U1.82 U1.83 U1.84 U1.85 U1.88 U1.89 U1.90 U1.92 U1.93 U1.94 U1.95 U1.96 U1.97 U1.98 U1.99 U1.100 U2.1 U2.2 U2.3 U2.7 U2.8 U2.9 U2.11 U2.12 U2.13 U2.14 U.1 U.2 U.3 U.4 U.5 U.6 U.7 U.8 U.9 U.10 U.11 U.12 U.13 U.14 U.15 U.16 U.17 U.18 U.19 U.20 U.21 U.22 U.23 U.24 U.25 U.26 U.29 U.30 U.31 U.32 U.33 U.34 U.35 U.36 U.37 U.38 U.39 U.40 U.41 U.42 U.43 U.44 U.45 U.46 U.47 U.48 U.49 U.50 U.51 U.52 U.53 U.54 U.55 U.56 U.57 U.58 U.59 U.60 U.61 U.62 U.63 U.64 U.65 U.66 U.67 U.68

## Text inside footprints (layer, text, board x,y; h text height)
J1: Mechanical 1 "PCB EDGE" at 2121.02,2457.17 h11.81 r90
P1: Top Overlay "1" at 5295,3980 h50 r90; Top Overlay "2" at 5195,3960 h50 r90; Top Overlay "4" at 5195,4220 h50 r90; Top Overlay "3" at 5295,4220 h50 r90
P4: Top Overlay "1" at 6290,2885 h50 r180; Top Overlay "2" at 6310,2785 h50 r180; Top Overlay "4" at 6050,2785 h50 r180; Top Overlay "3" at 6050,2885 h50 r180